# Altium PCB qav90_sharp_ref.PcbDoc (part 3 of 3)
Units mm, origin at the board's own origin, x right, y up, seen from the top; angles counter-clockwise.
Board outline 125.43 x 101.14 mm, 3 copper layers (Top Layer, Mid-Layer 1, Bottom Layer); 90 components, 77 nets, 313 pads, 238 vias.
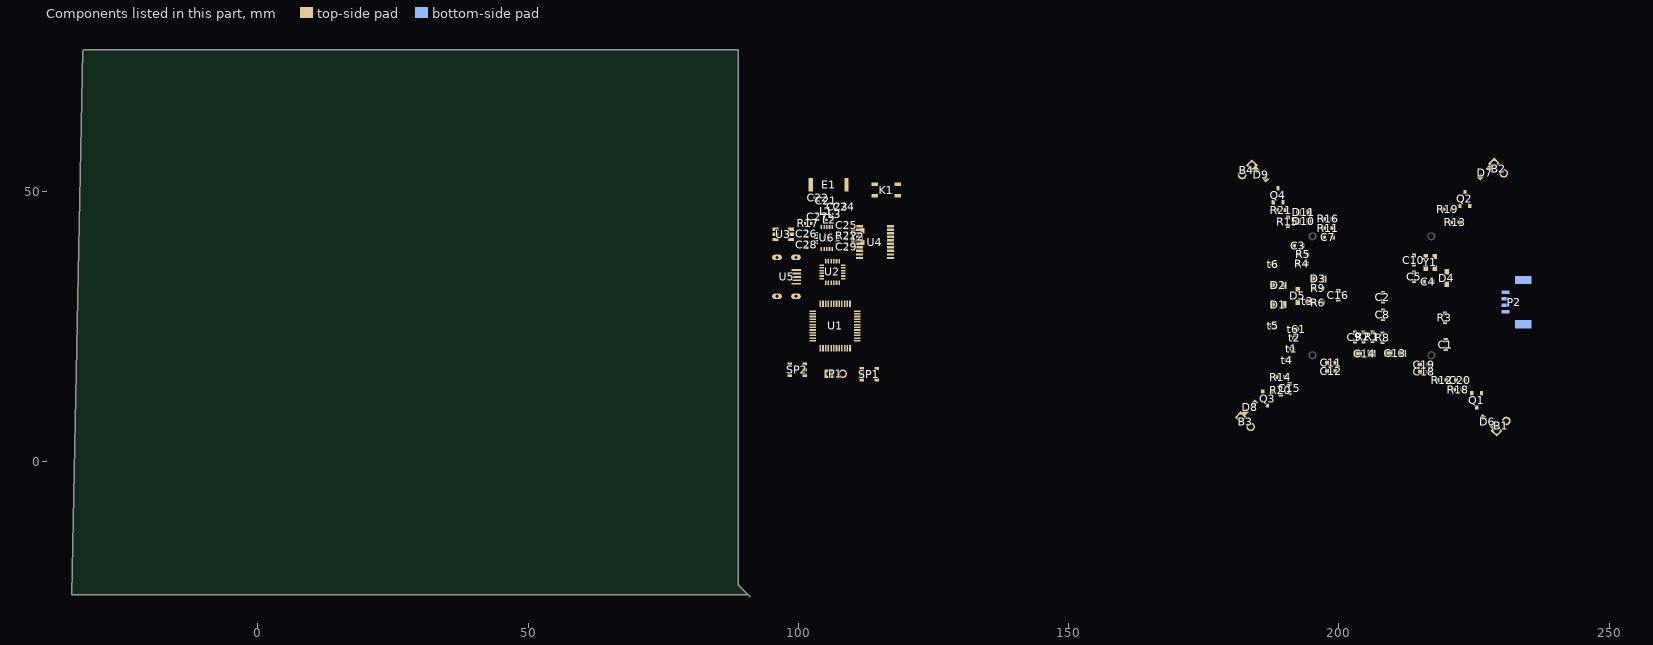
[diagram p3: the components of this part, seen from the top]

## Via types
v1: diameter 0.55, hole 0.25, Top Layer to Bottom Layer, tented both sides, 216 vias
v2: diameter 1.2, hole 1, Top Layer to Bottom Layer, 13 vias
v3: diameter 0.55, hole 0.25, Top Layer to Bottom Layer, 6 vias
v4: diameter 0.6, hole 0.6, Top Layer to Bottom Layer, tented both sides, 2 vias
v5: diameter 0.605, hole 0.3, Top Layer to Bottom Layer, tented both sides, 1 vias

## Nets (pads, with @x,y where several pads share a name; then routed paths per layer and width w, separated by ;. In a path a pad name is that pad's centre, name@x,y a point inside that pad or via, vN(x,y) a via of type N, cw(c..) or ccw(c..) an arc to the next point about the centre after c; other vN are vias at no path point) (continued)
copper on no net: (continued)
  Bottom Layer w0.254: v1@101.594,48.749 cw(c101.236,48.749) 101.489,48.497 cw(c101.742,48.244) v1@101.742,48.601 ; v1@101.662,46.895 cw(c101.409,46.642) 101.767,46.642 cw(c102.124,46.642) v1@101.871,46.895 ; v1(101.742,48.749) 100.967,47.974 100.967,45.077 101.957,44.086 107.208,44.086 108.656,42.638 110.42,42.638 ; v1(101.767,46.999) 101.767,45.086 102.153,44.7 107.382,44.7 108.936,43.146 110.487,43.146 ; 102.314,40.36 112.124,40.36 ; 102.433,39.87 104.795,39.87 106.116,38.549 v1(106.116,38.397) ; 102.525,39.387 104.643,39.387 105.303,38.727 ; 102.592,38.879 103.957,38.879 ; v1(102.713,47.033) 103.983,47.033 v1(104.186,46.829) 107.158,46.829 v1(108.301,45.686) ; 102.76,38.473 103.446,38.473 103.957,37.961 ; v1@102.817,46.928 cw(c103.07,46.675) 103.07,47.033 cw(c103.07,47.39) v1@102.817,47.137 ; 103.338,47.033 cw(c103.338,45.982) v1@104.081,46.725 ; 103.742,38.176 ccw(c103.957,38.391) 103.957,38.087 ; 103.951,47.033 cw(c103.951,46.595) v1@104.261,46.904 ; v1@104.29,46.725 cw(c104.543,46.472) 104.543,46.829 cw(c104.543,47.187) v1@104.29,46.934 ; 104.799,39.231 cw(c103.94,38.371) v1@105.155,38.371 ; v1@105.199,38.476 ccw(c104.95,38.727) 105.303,38.727 ; 105.233,38.797 cw(c104.807,38.371) v1@105.409,38.371 ; v1@105.303,38.219 105.303,38.727 ; v1@105.408,38.476 cw(c105.657,38.727) 105.303,38.727 ; 105.756,38.909 cw(c105.243,38.397) v1@105.968,38.397 ; v1@106.958,38.464 cw(c106.762,38.244) 107.056,38.244 ; 107.005,38.193 ccw(c106.625,38.573) v1@107.162,38.575 ; v1(107.056,38.574) 107.056,38.244 ; v1@107.154,38.464 ccw(c107.35,38.244) 107.056,38.244 ; v1@107.942,38.597 cw(c107.628,38.283) 108.072,38.283 ; v1(108.047,38.701) v1@108.072,38.727 ; 108.072,38.405 cw(c108.343,38.405) v1@108.151,38.597 ; v1@108.153,45.686 ccw(c107.795,45.686) 108.048,45.939 ccw(c108.301,46.192) v1@108.301,45.834 ; v1@108.301,45.538 cw(c108.301,45.181) 108.553,45.434 cw(c108.806,45.686) v1@108.449,45.686 ; 108.702,45.285 ccw(c108.971,45.554) v1@108.992,45.174 ; v1@108.864,45.197 ccw(c108.707,45.09) 108.707,45.28 ; v1@108.864,45.363 cw(c108.707,45.47) 108.707,45.28 ; v1@108.978,45.428 cw(c108.928,46.314) v1(108.301,45.686) ; v1@108.986,45.153 v1(108.986,45.28) 108.707,45.28 ; 187.536,26.034 ccw(c188.664,26.034) 187.866,25.237 187.536,25.567 187.536,27.929 188.374,28.767 190.592,28.767 ; 187.536,26.647 ccw(c189.277,26.647) 188.046,25.416 ; 187.536,27.26 ccw(c189.89,27.26) 188.226,25.596 ; 187.587,34.628 cw(c189.854,34.628) 188.251,36.231 ; 187.587,35.241 cw(c189.241,35.241) 188.071,36.411 ; 187.587,35.855 cw(c188.628,35.855) 187.892,36.59 187.587,36.286 187.587,33.644 188.324,32.907 v1(188.324,31.053) ; v1@188.219,31.158 ccw(c187.966,31.41) 188.324,31.41 ccw(c188.681,31.41) v1@188.428,31.158 ; v1(190.483,30.545) 190.621,30.684 191.214,30.684 191.279,30.748 ; v1@190.759,31.66 cw(c190.322,31.223) 190.94,31.223 ; v1(190.864,31.764) 190.94,31.688 190.94,31.087 191.279,30.748 ; 192.605,30.277 191.053,30.277 190.592,29.816 190.592,28.767 ; 192.605,30.912 191.442,30.912 191.279,30.748 ; 192.608,21.983 ccw(c193.426,21.983) v1@192.848,21.404 ; v1@192.616,21.274 192.608,21.282 192.608,23.398 191.651,24.355 191.651,26.427 190.592,27.486 190.592,28.767 ; v1(193.023,28.539) 193.658,28.539 193.962,28.234 193.962,24.904 194.216,24.65 v1(194.216,21.401) ; v1@193.127,28.434 cw(c193.38,28.181) 193.38,28.539 cw(c193.38,28.896) v1@193.127,28.643 ; 193.251,25.505 ccw(c194.129,25.505) v1@193.508,24.884 ; 193.251,25.711 cw(c193.869,25.711) v1@193.432,26.148 ; 193.251,25.963 cw(c193.402,25.963) v1@193.364,26.109 ; v1(193.404,24.779) 193.251,24.932 193.251,25.973 v1@193.454,26.176 ; v1@194.112,21.506 ccw(c193.859,21.758) 194.216,21.758 ccw(c194.574,21.758) v1@194.321,21.506 ; 197.112,27.653 ccw(c197.903,27.653) v1@197.344,27.094 ; v1@197.123,27.081 ccw(c197.012,27.169) 197.112,27.269 ; v1@197.241,27.137 cw(c197.243,27.269) 197.112,27.269 ; v1(197.264,30.977) 197.264,31.129 197.747,31.612 197.747,32.78 201.514,36.548 ; v1@197.412,30.977 cw(c198.138,30.977) 197.625,31.49 ; v1@197.417,26.964 197.112,27.269 ; v1(197.722,27.726) 198.026,28.031 198.026,28.745 198.606,29.325 198.606,29.687 199.144,30.224 199.144,32.418 201.792,35.066 ; v1@197.722,27.874 ccw(c197.722,28.231) 197.974,27.978 ccw(c198.227,27.726) v1@197.87,27.726 ; v1(197.976,29.961) 197.976,30.164 198.661,30.85 198.661,32.51 201.725,35.574 ; v1@198.124,29.961 cw(c198.971,29.961) 198.372,30.561 ; v1@198.437,24.144 ccw(c198.08,24.144) 198.333,24.397 ccw(c198.585,24.65) v1@198.585,24.292 ; v1(198.585,24.144) 198.204,24.525 198.204,26.659 198.433,26.888 198.433,28.081 198.992,28.64 v1(198.992,28.818) ; 198.613,28.262 ccw(c198.057,28.818) v1@198.844,28.818 ; v1@198.738,22.062 204.716,22.062 207.027,24.373 211.153,24.373 ; v1@198.769,21.498 ccw(c198.79,22.035) 199.169,21.655 ; v1@198.817,22.217 ccw(c199.192,22.592) 199.192,22.062 ; v1@198.89,21.376 199.169,21.655 ; v1(198.941,25.897) 198.966,25.897 198.992,25.922 200.516,25.922 200.947,26.354 200.947,28.945 200.566,29.326 200.566,32.116 201.967,33.517 206.739,33.517 207.272,34.05 207.272,34.914 ; v1@199.045,25.792 cw(c199.359,25.478) 199.359,25.922 ; v1@199.045,26.002 ccw(c199.237,26.193) 199.237,25.922 ; v1(199.246,27.421) 199.246,27.523 199.576,27.853 199.576,32.275 201.96,34.66 ; v1@199.394,27.421 cw(c199.996,27.421) 199.57,27.847 ; v1@200.055,28.872 ccw(c199.803,29.124) 200.16,29.124 ccw(c200.517,29.124) v1@200.265,28.872 ; v1(200.16,28.767) 200.147,28.767 200.16,28.78 200.16,32.285 201.878,34.003 202.145,34.003 ; 201.633,36.057 198.255,32.679 198.255,31.053 197.112,29.91 197.112,27.269 ; 201.913,34.003 ccw(c201.913,34.608) v1@202.341,34.18 ; v1@202.305,34.12 cw(c202.145,34.171) 202.145,34.003 ; v1@202.344,34.203 202.145,34.003 ; v1@202.837,31.532 cw(c202.493,31.188) 202.979,31.188 ; 202.889,34.417 cw(c202.599,34.127) v1@203.009,34.127 ; v1(202.942,31.636) 202.979,31.599 202.979,26.151 203.616,25.514 203.642,25.514 203.957,25.199 v1@204.554,25.199 ; v1(203.157,34.127) v1@203.157,34.149 ; 203.157,35.066 204.275,33.949 205.773,33.949 ; 203.741,31.158 cw(c204.27,31.158) v1@203.896,31.532 ; v1(203.792,31.636) 203.741,31.586 203.741,26.913 v1@205.329,25.325 ; 203.973,25.199 cw(c203.973,24.543) v1@204.437,25.007 ; v1@204.399,27.627 ccw(c204.146,27.88) 204.503,27.88 ccw(c204.861,27.88) v1@204.608,27.627 ; v1(204.503,27.523) 204.503,29.453 v1(204.58,29.529) ; 204.503,28.988 cw(c205.121,28.988) v1@204.684,29.425 ; 204.984,25.67 cw(c204.602,25.287) v1@205.143,25.287 ; 206.108,34.761 cw(c204.966,34.757) 205.773,33.949 ; 206.256,34.431 205.773,33.949 ; v1(206.717,25.661) 210.161,25.661 211.336,26.837 v1(211.336,28.767) ; v1@206.821,25.557 cw(c207.074,25.304) 207.074,25.661 cw(c207.074,26.019) v1@206.821,25.766 ; v1(209.126,23.103) 211.558,23.103 212.842,24.386 v1(212.842,26.036) ; v1@209.231,22.998 cw(c209.484,22.746) 209.484,23.103 cw(c209.484,23.46) v1@209.231,23.208 ; 209.62,38.826 213.228,35.217 213.228,29.609 213.546,29.291 213.546,28.625 213.512,28.591 213.512,28.132 213.546,28.098 ; 209.687,39.334 213.635,35.386 213.635,29.777 214.067,29.345 v1(214.067,28.361) ; 210.651,24.373 ccw(c210.651,25.337) v1@211.333,24.655 ; v1@210.925,25.262 cw(c211.528,25.262) 211.102,25.688 ; v1@210.927,25.367 ccw(c210.678,25.618) 211.031,25.618 ; v1(211.031,25.262) 211.031,25.618 ; v1@211.135,25.367 cw(c211.384,25.618) 211.031,25.618 ; v1@211.179,25.262 cw(c212.395,25.262) 211.535,26.122 ; v1@211.231,28.663 cw(c210.979,28.41) 211.336,28.41 cw(c211.693,28.41) v1@211.441,28.663 ; v1@211.317,24.536 211.153,24.373 ; 211.324,36.548 212.205,35.667 212.205,34.833 v1(212.225,34.812) ; v1@211.378,24.415 ccw(c211.297,24.23) 211.153,24.373 ; v1@211.81,25.255 212.225,24.84 212.225,24.475 211.717,23.967 207.196,23.967 204.884,21.655 199.169,21.655 ; v1@212.015,25.311 ccw(c212.644,25.311) 212.199,24.866 ; v1@212.12,34.917 ccw(c211.917,35.12) 212.205,35.12 ; 212.205,35.219 ccw(c212.632,35.219) v1@212.33,34.917 ; v1@212.4,32.65 cw(c212.147,32.398) 212.504,32.398 cw(c212.862,32.398) v1@212.609,32.65 ; v1(212.504,32.755) 212.504,27.091 211.031,25.618 ; v1@212.737,25.932 cw(c212.484,25.679) 212.842,25.679 cw(c213.199,25.679) v1@212.946,25.932 ; v1@213.25,27.703 ccw(c213.135,28.098) 213.546,28.098 ; v1(213.292,27.561) 213.546,27.816 213.546,28.098 ; v1@213.321,27.46 ccw(c213.234,27.759) 213.546,27.759 ; v1@213.962,28.466 ccw(c213.709,28.719) 214.067,28.719 ccw(c214.424,28.719) v1@214.171,28.466 ; v1(215.908,21.376) 217,22.468 219.413,22.468 220.328,23.382 220.328,27.345 221.292,28.309 221.292,29.911 220.961,30.242 220.005,30.242 ; v1@215.908,21.524 ccw(c215.908,21.881) 216.161,21.628 ccw(c216.413,21.376) v1@216.056,21.376 ; v1(218.143,23.128) 218.6,23.128 218.917,23.445 218.917,31.036 ; v1@218.248,23.024 cw(c218.501,22.771) 218.501,23.128 cw(c218.501,23.486) v1@218.248,23.233 ; 219.542,31.27 ccw(c219.485,30.468) 218.917,31.036 ; 220.005,31.442 219.322,31.442 218.917,31.036 ; 220.577,30.12 cw(c220.872,29.825) 220.872,30.242 cw(c220.872,30.66) 220.577,30.365 ; v1(108.301,45.686) 108.707,45.28
  Bottom Layer w0.508: 99.868,38.778 99.868,41.978 100.325,42.435 v1(100.325,42.461) ; v1@189.005,30.236 189.005,34.325 189.161,34.482 190.742,34.482 190.711,34.512 ; 189.005,33.799 cw(c189.768,33.799) 189.229,34.338 ; 189.055,34.512 190.711,34.512 ; v1(189.34,44.744) 190.533,43.55 v1(190.533,42.305) ; 189.729,14.724 189.859,14.594 v1(192.032,14.594) ; 189.975,34.482 ccw(c189.975,33.992) 189.629,34.338 cw(c190.048,33.918) 190.048,34.512 cw(c190.048,35.106) 189.629,34.686 ccw(c190.122,35.179) 190.122,34.482 ; 190.457,18.861 192.718,18.861 193.48,19.623 193.48,23.281 192.184,24.576 192.184,26.942 192.555,27.312 ; 190.631,18.687 cw(c191.051,18.267) 191.051,18.861 cw(c191.051,19.455) 190.631,19.035 ; v1(191.219,29.656) 191.233,29.642 192.605,29.642 ; v1@191.549,38.648 192.555,37.643 192.555,34.512 ; 191.88,29.58 192.667,29.58 ; 191.931,32.116 ccw(c191.258,32.789) 192.21,32.789 ; 191.981,27.138 cw(c191.489,26.646) 192.184,26.646 ; 191.981,34.686 cw(c191.561,35.106) 191.561,34.512 cw(c191.561,33.918) 191.981,34.338 cw(c191.427,33.785) 192.21,33.785 ; v1(192.083,13.527) 192.108,13.527 193.861,15.28 194.883,15.28 195.821,16.218 196.933,16.218 ; 192.184,26.79 cw(c192.677,26.79) 192.329,27.138 ; 192.381,34.686 ccw(c191.961,35.106) 192.555,35.106 ccw(c193.149,35.106) 192.729,34.686 ; 192.605,32.233 192.21,32.233 192.21,34.167 192.555,34.512 ; v1(193.068,33.013) 193.861,33.807 193.861,35.317 v1@193.492,35.686 ; v1@193.417,35.761 v1@193.492,35.686 ; v1(193.492,35.761) v1@193.492,35.686 ; v1(194.343,43.042) 197.645,43.042 198.192,42.496 198.192,40.921 v1(197.645,40.375) ; v1@196.665,17.576 cw(c196.02,16.931) 196.933,16.931 ; v1(196.68,17.591) 196.933,17.339 196.933,16.218 ; v1(198.331,34.228) 199.068,34.965 ; v1@201.064,17.327 ccw(c201.885,18.148) 201.885,16.986 ; v1(202.09,31.866) 202.208,31.866 202.659,32.318 212.067,32.318 v1(212.504,32.755) ; 204.391,16.6 ccw(c203.458,15.668) 203.458,16.986 ccw(c203.458,18.305) 204.391,17.372 ; v1(204.522,22.779) 204.522,22.817 206.035,24.33 206.035,25.944 206.381,26.29 206.381,26.343 207.055,26.343 v1(207.069,26.329) 207.247,26.329 207.307,26.389 207.307,30.097 208.263,31.053 210.345,31.053 v1(210.396,31.104) ; 204.777,16.986 201.374,16.986 v1(201.049,17.312) 198.026,17.312 196.933,16.218 ; v1@207.054,26.344 ccw(c206.444,26.954) 207.307,26.954 ; v1(211.844,16.905) 212.193,17.255 v1(213.819,17.255) ; v1@211.859,16.891 cw(c212.738,16.012) 212.738,17.255 ; v1(213.927,39.384) v1(213.927,40.934) ; v1(215.552,20.436) 215.73,20.614 216.187,20.614 216.949,21.376 218.296,21.376 v1(218.651,21.731) 218.651,20.436 219.362,19.725 v1(220.251,19.725) ; v1@215.567,20.421 cw(c216.032,19.956) 216.032,20.614 ; 217.367,32.692 217.417,32.642 220.005,32.642 220.644,32.642 221.725,31.561 v1@222.791,31.561 ; 217.742,21.376 ccw(c217.742,22.641) v1@218.636,21.746 ; v1(219.185,37.225) 219.185,37.632 v1(220.836,39.283) ; v1@219.206,37.225 cw(c220.237,37.225) 219.508,37.955 ; v1@219.525,24.667 ccw(c218.876,25.316) 219.794,25.316 ; v1(219.54,24.652) 219.794,24.906 219.794,28.832 v1@220.005,29.042 ; 219.794,28.423 cw(c220.624,28.423) v1@220.037,29.01 ; 219.794,28.594 cw(c220.434,28.594) v1@219.981,29.047 ; 220.455,32.596 cw(c220.455,32.029) 220.856,32.43 ; 190.711,34.512 192.555,34.512
  Bottom Layer w1.27: 194.384,38.994 194.527,38.994 v1@196.01,40.477
  Bottom Layer w2.54: 181.871,8.307 187.301,13.738 188.743,13.738 189.729,14.724 189.961,14.724 192.422,17.185 193.412,17.185 193.803,17.576 194.089,17.576 195.702,19.189 ; 183.876,54.888 183.876,54.86 192.515,46.221 192.515,40.863 194.384,38.994 195.542,37.836 195.542,25.516 195.994,25.063 195.994,19.481 196.01,19.496 196.213,19.293 211.423,19.293 213.795,21.665 213.795,21.905 217.367,25.476 217.367,32.692 217.367,38.446 220.808,41.887 220.808,47.222 228.713,55.127 228.713,55.165 ; 195.179,18.666 ccw(c194.097,19.748) 195.628,19.748 ; 195.475,19.381 ccw(c194.222,20.634) 195.994,20.634 ; 207.517,17.386 208.022,17.891 208.022,17.916 208.632,18.526 ; 213.327,20.146 215.898,17.576 217.66,17.576 229.321,5.915
  other v1: 171.509,-7.402 240.698,-7.275 170.671,-6.92 241.537,-6.92 172.042,-6.564 240.267,-6.412 171.052,-5.955 241.079,-5.955 170.061,-5.04 242.172,-5.015 243.823,-4.812 168.156,-4.761 169.07,-4.177 243.238,-4.177 244.254,-3.77 167.902,-3.643 243.416,-3.237 168.867,-3.11 233.84,-0.367 178.164,-0.138 233.002,0.243 179.23,0.268 234.145,0.675 178.062,0.853 233.205,1.437 178.926,1.513 235.212,1.665 176.868,1.792 236.279,2.707 176.081,2.783 237.295,3.012 175.268,3.24 235.796,3.52 176.741,3.621 236.685,3.926 220.185,16.28 192.743,21.3 198.712,22.112 211.438,24.551 204.542,25.111 193.327,26.253 224.392,26.278 197.239,26.989 222.817,27.218 223.63,27.243 222.004,27.269 224.442,27.269 202.446,34.076 224.468,34.381 222.004,34.812 222.944,34.812 223.782,34.812 223.68,35.651 224.417,35.701 105.303,38.371 215.248,39.181 199.068,40.223 212.149,40.35 196.248,40.477 215.375,41.035 212.149,41.823 213.038,42.712 218.473,43.22 100.528,43.299 214.994,43.398 216.391,43.474 212.047,44.185 212.25,45.049 213.139,45.252 214.206,45.531 217.28,45.633 110.129,45.636 111.044,45.686 196.172,46.166 110.942,46.575 109.977,46.677 217.737,46.725 111.933,47.007 109.215,47.261 111.044,47.541 110.129,47.795 111.907,47.845 109.037,48.43 110.841,48.658 109.85,48.684 112.034,48.76 236.634,57.596 175.878,57.622 235.568,57.977 176.767,58.079 175.547,58.282 237.015,58.333 236.177,58.892 176.233,59.146 235.06,59.908 177.275,60.06 233.485,60.263 179.154,60.568 234.247,60.822 178.214,60.974 233.104,61.279 179.408,61.584 233.993,61.813 178.697,62.168 243.569,64.454 168.74,64.581 244.305,65.064 168.08,65.191 242.959,65.47 169.197,65.699 243.823,66.156 168.486,66.232 170.137,66.537 241.968,66.689 241.13,67.502 171.255,67.756 240.216,67.909 172.042,68.036 241.74,68.315 170.772,68.493 171.585,68.848 240.8,68.848
  other v2: 33.3,11.5 94.7,15.513 118,17.913 117,22.513 117,31.113 96.3,31.413 117.1,38.113 96.3,38.313 96.4,46.613 117.2,46.913 96.4,52.813 117.1,52.813 32.5,53.3
  other v3: 187.384,46.649 186.596,47.512 185.682,48.554 186.723,48.757 184.818,49.544 186.139,49.722
  other v4: 98.25,32.243 98.25,36.243

## Keep-outs
Keep-Out Layer:
  lines w0.2: 13.963,8.9 cw(c24.631,-5.369) 24.401,12.446 ; 14.6,16.722 ccw(c4.061,28.661) 19.986,28.699 ; 14.6,48.278 cw(c4.061,36.339) 19.986,36.301 ; 40.599,12.446 cw(c40.369,-5.369) 51.037,8.9 ; 40.599,52.554 ccw(c40.369,70.369) 51.037,56.1 ; 45.014,28.699 ccw(c60.939,28.661) 50.4,16.722 ; 45.014,36.301 cw(c60.939,36.339) 50.4,48.278 ; 102.961,49.652 102.961,53.123 102.967,53.129 110.968,53.129 ; 110.917,49.623 110.968,49.674 ; 169.218,-4.99 169.218,-4.976 ; 170.39,67.658 170.405,67.658 ; 176.834,2.64 176.838,2.64 ; 178.021,60.039 178.021,60.042 ; 180.688,57.35 180.713,57.35 ; 232.657,5.332 232.657,5.357 ; 232.707,56.14 232.707,56.165 ; 235.346,2.665 235.349,2.665 ; 235.396,58.832 235.399,58.832 ; 242.965,-4.965 242.965,-4.951 ; 243.015,66.448 243.015,66.463
  lines w0.25: 168.326,-5.868 169.211,-4.983 ; 168.385,67.442 169.28,66.548 170.39,67.658 ; 169.218,-4.99 170.329,-6.101 169.434,-6.995 ; 169.513,68.55 170.397,67.665 ; 176.834,2.64 179.526,5.332 ; 176.838,2.64 177.954,1.524 180.631,4.202 ; 177.045,55.81 186.738,46.117 ; 177.556,6.197 186.471,15.111 ; 178.021,60.039 176.905,58.923 179.582,56.245 180.688,57.35 ; 178.021,60.042 180.713,57.35 ; 181.172,59.785 190.159,50.799 ; 181.512,2.152 190.108,10.748 ; 222.108,10.748 230.675,2.18 ; 222.285,50.926 230.696,59.337 ; 225.541,46.181 234.608,55.248 ; 225.671,15.185 234.583,6.273 ; 232.657,5.332 231.552,4.227 234.23,1.549 235.346,2.665 ; 232.657,5.357 235.349,2.665 ; 232.707,56.14 235.399,58.832 ; 232.707,56.165 231.602,57.271 234.28,59.948 235.396,58.832 ; 242.749,-6.97 241.855,-6.076 242.965,-4.965 ; 242.799,68.468 241.905,67.573 243.015,66.463 ; 242.972,-4.958 243.857,-5.843 ; 243.022,66.456 243.907,67.34
  lines w0.254: -0.6,6.675 ccw(c-1.05,18.025) 6.41,9.46 ; -0.6,58.325 cw(c-1.05,46.975) 6.41,55.54 ; -0.28,6.694 ccw(c0,0) 6.611,-1.09 cw(c22.4,-5.339) 9.95,5.26 ; -0.28,58.306 cw(c0,65) 6.611,66.09 ccw(c22.4,70.339) 9.95,59.74 ; 6.025,9.1 14.57,16.696 ; 6.025,55.9 14.57,48.304 ; 9.856,5.25 13.963,8.9 ; 9.856,59.75 13.1,56.867 ; 13.1,56.867 ccw(c24.933,70.933) 24.295,52.562 ; 29.5,52.5 cw(c32.5,52.5) 35.5,52.5 ; 31.358,12.3 ccw(c33.3,12.3) 35.242,12.3 ; 50.43,48.304 58.975,55.9 ; 51.037,8.9 52.866,7.274 ; 51.037,56.1 55.144,59.75 ; 51.9,8.133 55.144,5.25 ; 55.05,5.26 cw(c42.6,-5.339) 58.389,-1.09 ccw(c65,0) 65.28,6.694 ; 55.05,59.74 ccw(c42.6,70.339) 58.389,66.09 cw(c65,65) 65.28,58.306 ; 56.885,10.958 50.43,16.696 58.975,9.1 ; 58.59,9.46 ccw(c66.05,18.025) 65.6,6.675 ; 58.59,55.54 cw(c66.05,46.975) 65.6,58.325 ; 110.968,49.674 110.968,53.129 ; 168.301,-5.842 cw(c173.608,-1.752) 173.614,4.948 ; 168.369,67.426 ccw(c173.608,63.248) 173.605,56.548 ; 169.43,-6.99 ccw(c173.608,-1.752) 180.308,-1.755 ; 169.517,68.554 cw(c173.608,63.248) 180.308,63.242 ccw(c185.931,62.841) 181.187,59.794 ; 173.68,56.564 cw(c174.081,50.941) 177.127,55.685 ; 180.312,-1.701 cw(c185.935,-1.299) 181.492,2.171 ; 186.49,15.092 ccw(c175.342,26.24) 191.108,26.24 191.095,26.227 188.88,26.227 ; 186.757,46.135 cw(c176.252,35.631) 191.108,35.631 188.911,35.631 188.879,35.662 ; 186.879,26.268 186.879,26.748 ; 188.859,25.238 cw(c187.859,25.238) 186.859,25.238 186.859,36.61 cw(c187.859,36.61) 188.859,36.61 ; 188.859,25.238 188.859,26.213 ; 188.859,35.635 188.859,36.61 ; 190.087,10.769 cw(c202.108,-1.252) 202.108,15.748 210.008,15.748 ; 190.14,50.818 ccw(c202.161,62.839) 202.161,45.839 ; 210.108,15.748 cw(c210.108,-1.252) 222.129,10.769 ; 210.161,45.839 ccw(c210.161,62.839) 222.265,50.902 ; 223.1,26.088 223.1,25.113 ccw(c224.1,25.113) 225.1,25.113 225.1,36.485 ccw(c224.1,36.485) 223.1,36.485 223.1,35.51 221.114,35.51 221.108,35.504 cw(c236.218,35.504) 225.533,46.188 ; 223.1,26.131 221.137,26.131 ccw(c236.617,26.131) 225.671,15.185 ; 230.691,2.196 cw(c226.248,-1.274) 231.871,-1.676 ; 230.741,59.302 ccw(c226.298,62.772) 231.921,63.173 ; 231.908,-1.755 ccw(c238.608,-1.752) 242.785,-6.99 ; 231.908,63.251 cw(c238.608,63.248) 242.785,68.487 ; 234.547,6.237 ccw(c238.148,10.576) 238.549,4.952 ; 234.597,55.26 cw(c238.198,50.922) 238.599,56.545 ; 238.602,4.948 cw(c238.608,-1.752) 243.914,-5.842 ; 238.602,56.548 ccw(c238.608,63.248) 243.914,67.339

## Other copper
Top Layer:
  pour cut-out: 103.068,43.713 107.537,43.713 107.537,39.163 102.987,39.163
  pour cut-out: 184.064,56.936 184.064,56.554 180.204,52.694 166.759,52.694 164.244,55.209 164.651,55.615 164.651,67.375 167.242,67.375 172.652,72.785 172.982,72.455 179.688,72.455 184.183,67.959 184.183,56.86
  pour cut-out: 232.596,53.398 232.214,53.398 228.354,57.257 228.354,70.703 230.869,73.217 231.275,72.811 243.035,72.811 243.035,70.22 248.445,64.81 248.115,64.48 248.115,57.774 243.619,53.278 232.52,53.278
  pour cut-out: 229.261,3.621 229.261,4.003 233.121,7.863 246.566,7.863 249.08,5.348 248.674,4.942 248.674,-6.818 246.083,-6.818 240.673,-12.228 240.343,-11.898 233.637,-11.898 229.141,-7.402 229.141,3.697
  pour cut-out: 179.688,8.328 180.07,8.328 183.929,4.468 183.929,-8.977 181.415,-11.492 181.008,-11.085 169.248,-11.085 169.248,-8.495 163.838,-3.084 164.168,-2.754 164.168,3.951 168.664,8.447 179.764,8.447
  region: 177.325,3.951 176.589,4.358 175.497,4.586 175.166,4.79 174.1,3.799 174.1,3.062 175.014,2.275 175.878,2.173 177.021,1.03 177.021,0.649 177.529,0.141 177.656,-0.392 177.757,-0.671 178.951,-0.671 178.951,-0.595 179.916,0.37 179.916,0.649 179.688,0.878 179.688,1.335 179.23,1.792 179.23,2.119 178.86,2.489 178.494,2.123 178.485,2.123 178.113,1.75 178.091,1.772 177.808,1.772 177.097,2.483 177.097,2.554 177.025,2.554 176.853,2.726 177.24,3.113 177.3,3.113 177.3,3.173 177.656,3.528 177.656,3.697
  region: 233.104,1.996 232.697,1.259 232.469,0.167 232.266,-0.163 233.256,-1.23 233.993,-1.23 234.78,-0.316 234.882,0.548 236.025,1.691 236.406,1.691 236.914,2.199 237.447,2.326 237.727,2.427 237.727,3.621 237.65,3.621 236.685,4.586 236.406,4.586 236.177,4.358 235.72,4.358 235.263,3.901 234.936,3.901 234.566,3.53 234.933,3.164 234.933,3.156 235.305,2.783 235.284,2.762 235.284,2.478 234.572,1.767 234.501,1.767 234.501,1.695 234.329,1.524 233.942,1.911 233.942,1.97 233.882,1.97 233.527,2.326 233.358,2.326
  region: 234.907,57.672 235.644,57.266 236.736,57.037 237.066,56.834 238.133,57.825 238.133,58.561 237.219,59.349 236.355,59.45 235.212,60.593 235.212,60.974 234.704,61.482 234.577,62.016 234.475,62.295 233.282,62.295 233.282,62.219 232.316,61.254 232.316,60.974 232.545,60.746 232.545,60.289 233.002,59.831 233.002,59.505 233.372,59.135 233.739,59.501 233.747,59.501 234.12,59.874 234.141,59.852 234.425,59.852 235.136,59.141 235.136,59.069 235.207,59.069 235.379,58.898 234.992,58.511 234.933,58.511 234.933,58.451 234.577,58.095 234.577,57.926
  region: 179.281,59.527 179.688,60.263 179.916,61.355 180.119,61.686 179.129,62.752 178.392,62.752 177.605,61.838 177.503,60.974 176.36,59.831 175.979,59.831 175.471,59.323 174.938,59.196 174.658,59.095 174.658,57.901 174.735,57.901 175.7,56.936 175.979,56.936 176.208,57.164 176.665,57.164 177.122,57.622 177.449,57.622 177.819,57.992 177.452,58.358 177.452,58.367 177.08,58.739 177.101,58.761 177.101,59.044 177.813,59.755 177.884,59.755 177.884,59.827 178.056,59.999 178.443,59.612 178.443,59.552 178.503,59.552 178.858,59.196 179.027,59.196
  region: 169.883,-7.275 170.62,-7.682 171.712,-7.91 172.042,-8.114 173.109,-7.123 173.109,-6.386 172.195,-5.599 171.331,-5.497 170.188,-4.354 170.188,-3.973 169.68,-3.465 169.553,-2.932 169.451,-2.653 168.258,-2.653 168.258,-2.729 167.292,-3.694 167.292,-3.973 167.521,-4.202 167.521,-4.659 167.978,-5.116 167.978,-5.443 168.348,-5.813 168.715,-5.447 168.723,-5.447 169.096,-5.074 169.117,-5.096 169.401,-5.096 170.112,-5.807 170.112,-5.878 170.183,-5.878 170.355,-6.05 169.968,-6.437 169.909,-6.437 169.909,-6.497 169.553,-6.852 169.553,-7.021
  region: 244.153,-5.421 244.559,-4.685 244.788,-3.592 244.991,-3.262 244,-2.195 243.264,-2.195 242.476,-3.11 242.375,-3.973 241.232,-5.116 240.851,-5.116 240.343,-5.624 239.809,-5.751 239.53,-5.853 239.53,-7.047 239.606,-7.047 240.571,-8.012 240.851,-8.012 241.079,-7.783 241.537,-7.783 241.994,-7.326 242.32,-7.326 242.69,-6.956 242.324,-6.59 242.324,-6.581 241.951,-6.209 241.973,-6.187 241.973,-5.904 242.684,-5.193 242.756,-5.193 242.756,-5.121 242.928,-4.949 243.315,-5.336 243.315,-5.396 243.374,-5.396 243.73,-5.751 243.899,-5.751
  region: 244.28,66.918 244.686,66.181 244.915,65.089 245.118,64.759 244.127,63.692 243.391,63.692 242.603,64.607 242.502,65.47 241.359,66.613 240.978,66.613 240.47,67.121 239.936,67.248 239.657,67.35 239.657,68.544 239.733,68.544 240.698,69.509 240.978,69.509 241.206,69.28 241.664,69.28 242.121,68.823 242.447,68.823 242.817,68.453 242.451,68.086 242.451,68.078 242.078,67.705 242.1,67.684 242.1,67.401 242.811,66.689 242.883,66.689 242.883,66.618 243.055,66.446 243.442,66.833 243.442,66.893 243.501,66.893 243.857,67.248 244.026,67.248
  region: 168.054,67.02 167.546,66.283 167.419,65.191 167.115,64.886 168.207,63.794 168.943,63.794 169.68,64.734 169.832,65.572 170.975,66.715 171.356,66.715 171.864,67.223 172.449,67.223 172.677,67.451 172.677,68.645 172.601,68.645 171.636,69.61 171.356,69.61 171.128,69.382 170.671,69.382 170.213,68.925 169.887,68.925 169.517,68.554 169.883,68.188 169.883,68.18 170.256,67.807 170.234,67.786 170.234,67.502 169.523,66.791 169.451,66.791 169.451,66.719 169.28,66.548 168.893,66.935 168.893,66.994 168.833,66.994 168.477,67.35 168.308,67.35
  pour cut-out: 134.525,42.899 134.551,42.924 137.573,42.924 137.573,39.851 137.523,39.8 134.5,39.8
  pour cut-out: 102.961,49.652 103.043,49.57 103.043,44.551 103.881,43.713 104.076,43.908 106.218,43.858 106.65,44.264 107.031,44.62 107.005,46.321 108.682,48.658 110.917,49.623 110.968,51.554 109.621,51.503 107.31,51.401 104.414,51.351 102.967,51.655
Bottom Layer:
  pour cut-out: 183.883,56.557 183.883,56.483 179.84,52.44 162.289,52.44 162.289,64.962 161.984,65.267 166.175,69.458 166.175,74.64 180.45,74.64 185.987,69.102 185.987,58.661
  pour cut-out: 180.727,7.588 180.801,7.588 184.844,3.545 184.844,-14.006 172.322,-14.006 172.017,-14.311 167.826,-10.12 162.644,-10.12 162.644,4.155 168.181,9.692 178.623,9.692
  pour cut-out: 246.335,6.445 246.409,6.445 250.452,2.402 250.452,-15.149 237.93,-15.149 237.625,-15.454 233.434,-11.263 228.252,-11.263 228.252,3.012 233.79,8.549 244.231,8.549
  pour cut-out: 230.102,70.396 230.102,70.47 234.145,74.513 251.697,74.513 251.697,61.99 252.001,61.686 247.81,57.495 247.81,52.313 233.536,52.313 227.998,57.85 227.998,68.292
  region: 179.256,59.476 179.662,60.212 179.891,61.305 180.094,61.635 179.103,62.702 178.367,62.702 177.579,61.787 177.478,60.924 176.335,59.781 175.954,59.781 175.446,59.273 174.912,59.146 174.633,59.044 174.633,57.85 174.709,57.85 175.674,56.885 175.954,56.885 176.182,57.114 176.64,57.114 177.097,57.571 177.423,57.571 177.793,57.941 177.427,58.307 177.427,58.316 177.054,58.688 177.076,58.71 177.076,58.993 177.787,59.704 177.859,59.704 177.859,59.776 178.031,59.948 178.418,59.561 178.418,59.501 178.477,59.501 178.833,59.146 179.002,59.146
  region: 168.004,66.994 167.597,66.258 167.369,65.165 167.165,64.835 168.156,63.768 168.893,63.768 169.68,64.683 169.782,65.546 170.925,66.689 171.306,66.689 171.814,67.197 172.347,67.324 172.626,67.426 172.626,68.62 172.55,68.62 171.585,69.585 171.306,69.585 171.077,69.356 170.62,69.356 170.163,68.899 169.836,68.899 169.466,68.529 169.832,68.163 169.832,68.154 170.205,67.782 170.183,67.76 170.183,67.477 169.472,66.766 169.401,66.766 169.401,66.694 169.229,66.522 168.842,66.909 168.842,66.969 168.782,66.969 168.427,67.324 168.258,67.324
  region: 234.907,57.622 235.644,57.215 236.736,56.987 237.066,56.783 238.133,57.774 238.133,58.511 237.219,59.298 236.355,59.4 235.212,60.543 235.212,60.924 234.704,61.432 234.577,61.965 234.475,62.244 233.282,62.244 233.282,62.168 232.316,61.203 232.316,60.924 232.545,60.695 232.545,60.238 233.002,59.781 233.002,59.454 233.372,59.084 233.739,59.45 233.747,59.45 234.12,59.823 234.141,59.801 234.425,59.801 235.136,59.09 235.136,59.019 235.207,59.019 235.379,58.847 234.992,58.46 234.933,58.46 234.933,58.4 234.577,58.045 234.577,57.876
  region: 244.254,66.943 244.661,66.207 244.889,65.115 245.093,64.784 244.102,63.718 243.365,63.718 242.578,64.632 242.476,65.496 241.333,66.639 240.952,66.639 240.444,67.147 239.911,67.274 239.632,67.375 239.632,68.569 239.708,68.569 240.673,69.534 240.952,69.534 241.181,69.306 241.638,69.306 242.095,68.848 242.422,68.848 242.792,68.478 242.426,68.112 242.426,68.103 242.053,67.731 242.075,67.709 242.075,67.426 242.786,66.715 242.857,66.715 242.857,66.643 243.029,66.471 243.416,66.858 243.416,66.918 243.476,66.918 243.831,67.274 244,67.274
  region: 242.324,-7.25 241.587,-7.656 240.495,-7.885 240.165,-8.088 239.098,-7.098 239.098,-6.361 240.013,-5.574 240.876,-5.472 242.019,-4.329 242.019,-3.948 242.527,-3.44 242.654,-2.907 242.756,-2.627 243.95,-2.627 243.95,-2.703 244.915,-3.669 244.915,-3.948 244.686,-4.177 244.686,-4.634 244.229,-5.091 244.229,-5.417 243.859,-5.788 243.492,-5.421 243.484,-5.421 243.111,-5.049 243.09,-5.07 242.807,-5.07 242.095,-5.781 242.095,-5.853 242.024,-5.853 241.852,-6.025 242.239,-6.412 242.299,-6.412 242.299,-6.471 242.654,-6.827 242.654,-6.996
  region: 234.882,3.926 235.618,4.332 236.711,4.561 237.041,4.764 238.108,3.774 238.108,3.037 237.193,2.25 236.33,2.148 235.187,1.005 235.187,0.624 234.679,0.116 234.552,-0.417 234.45,-0.697 233.256,-0.697 233.256,-0.621 232.291,0.345 232.291,0.624 232.52,0.853 232.52,1.31 232.977,1.767 232.977,2.093 233.347,2.464 233.713,2.097 233.722,2.097 234.094,1.725 234.116,1.746 234.399,1.746 235.11,2.457 235.11,2.529 235.182,2.529 235.354,2.701 234.967,3.088 234.907,3.088 234.907,3.147 234.552,3.503 234.552,3.672
  region: 179.142,2.097 179.548,1.361 179.777,0.268 179.98,-0.062 178.989,-1.129 178.253,-1.129 177.465,-0.214 177.364,0.649 176.221,1.792 175.84,1.792 175.332,2.3 174.798,2.427 174.519,2.529 174.519,3.723 174.595,3.723 175.56,4.688 175.84,4.688 176.068,4.459 176.525,4.459 176.983,4.002 177.309,4.002 177.679,3.632 177.313,3.266 177.313,3.257 176.94,2.885 176.962,2.863 176.962,2.58 177.673,1.869 177.745,1.869 177.745,1.797 177.916,1.625 178.303,2.012 178.303,2.072 178.363,2.072 178.719,2.427 178.888,2.427
  region: 168.029,-5.396 167.623,-4.659 167.394,-3.567 167.191,-3.237 168.181,-2.17 168.918,-2.17 169.705,-3.084 169.807,-3.948 170.95,-5.091 171.331,-5.091 171.839,-5.599 172.372,-5.726 172.652,-5.828 172.652,-7.021 172.576,-7.021 171.61,-7.987 171.331,-7.987 171.102,-7.758 170.645,-7.758 170.188,-7.301 169.862,-7.301 169.491,-6.931 169.858,-6.564 169.858,-6.556 170.23,-6.183 170.209,-6.162 170.209,-5.878 169.498,-5.167 169.426,-5.167 169.426,-5.096 169.254,-4.924 168.867,-5.311 168.867,-5.37 168.808,-5.37 168.452,-5.726 168.283,-5.726
  pour cut-out: 103.043,49.57 103.221,49.344 110.478,49.185 110.968,49.674 110.968,53.129 102.967,53.129 102.961,53.123

## Silkscreen, mask and mechanical layers (free items; w line width, h text height)
Top Overlay:
  circle w0.254: c0,0 r27.5
  circle w0.254: c65,0 r27.5
  circle w0.254: c0,65 r27.5
  circle w0.254: c65,65 r27.5
  region: 42.6,12.8 42.6,51.8 23.4,51.8 23.4,12.8
  lines w0.5: 201.342,17.236 202.742,17.236 ; 209.642,17.311 211.192,17.311 ; 210.392,16.536 210.392,18.136
  text "2" at 230.217,56.761 h0.64
  text "4" at 181.667,56.511 h0.64
  text "1" at 229.292,9.261 h0.64
  text "3" at 181.717,4.111 h0.64
Bottom Overlay:
  region: 45,12.5 45,52.5 20,52.5 20,12.5
Top Solder:
  rectangle: 166.327,55.562 182.888,70.042
  rectangle: 231.173,54.777 246.617,71.16
  rectangle: 231.961,-8.926 246.083,6.11
  rectangle: 165.006,-9.714 180.704,6.187
Bottom Solder:
  rectangle: 231.326,55.793 245.931,70.499
  rectangle: 231.707,-9.46 246.896,5.729
  rectangle: 165.616,-9.536 181.923,5.348
  rectangle: 166.454,55.894 181.364,69.839
  rectangle: 104.084,40.606 106.446,42.765
  lines w0.2: 19.986,28.699 20,36.301 ; 24.401,12.5 40.599,12.446 ; 24.5,52.5 40.6,52.5 ; 45,36.301 45.014,28.699
Mechanical 1:
  circle w0.254: c0,0 r4.24
  circle w0.254: c65,0 r4.24
  circle w0.254: c65,65 r4.24
  circle w0.254: c173.608,63.248 r4.24
  circle w0.254: c238.608,63.248 r4.24
  circle w0.254: c238.608,-1.752 r4.24
  circle w0.254: c173.608,-1.752 r4.24
  circle w0.254: c0,65 r4.24

## Text inside footprints (layer, text, board x,y; h text height)
U1: Top Overlay "STM32" at 104.992,27.132 h0.64